# EAGLE board Arduino Uno (EAGLE 7.6.0)

Size 68.58 x 63.5 mm. Coordinates in mm from the lower left corner, seen from the top.
Copper layers (1*16): Top 0.035mm / dielectric 1.5mm / Bottom 0.035mm
Design rules "default": minimum track width 10mil, minimum drill 24mil, track to track 8mil, track to pad 8mil, pad to pad 8mil, via to via 8mil, smd to smd 8mil, copper to edge 40mil, drill to drill 8mil, minimum pad ring 10mil, minimum via ring 8mil, stop-mask expansion 4mil, vias tented up to drill 0mil, thermal gap 10mil

## Footprints (pad centres in the part's own frame; a part is rotated, then mirrored left to right if it is on the bottom)
ARDUINO_UNO = smd 0.711 x 1.422 bottom: 0@1 30.48,23.114; 1@1 27.94,23.114; 2@1 25.4,23.114; 3.3V@1 2.54,-20.574; 3@1 22.86,23.114; 4@1 20.32,23.114; 5@1 17.78,23.114; 5V@1 5.08,-20.574; 6@1 15.24,23.114; 7@1 12.7,23.114; 8@1 8.636,23.114; 9@1 6.096,23.114; 10@1 3.556,23.114; 11@1 1.016,23.114; 12@1 -1.524,23.114; 13@1 -4.064,23.114; A0@1 17.78,-20.574; A1@1 20.32,-20.574; A2@1 22.86,-20.574; A3@1 25.4,-20.574; A4@1 27.94,-20.574; A5@1 30.48,-20.574; AREF@1 -9.144,23.114; GND..@1 7.62,-20.574; GND.@1 10.16,-20.574; GND@1 -6.604,23.114; I/OREF@1 -2.54,-20.574; N/C@1 -5.08,-20.574; RESET@1 0,-20.574; SCL@1 -14.224,23.114; SDA@1 -11.684,23.114; VIN@1 12.7,-20.574 | smd 0.711 x 1.422: 0@2 30.48,23.114; 1@2 27.94,23.114; 2@2 25.4,23.114; 3.3V@2 2.54,-20.574; 3@2 22.86,23.114; 4@2 20.32,23.114; 5@2 17.78,23.114; 5V@2 5.08,-20.574; 6@2 15.24,23.114; 7@2 12.7,23.114; 8@2 8.636,23.114; 9@2 6.096,23.114; 10@2 3.556,23.114; 11@2 1.016,23.114; 12@2 -1.524,23.114; 13@2 -4.064,23.114; A0@2 17.78,-20.574; A1@2 20.32,-20.574; A2@2 22.86,-20.574; A3@2 25.4,-20.574; A4@2 27.94,-20.574; A5@2 30.48,-20.574; AREF@2 -9.144,23.114; GND..@2 7.62,-20.574; GND.@2 10.16,-20.574; GND@2 -6.604,23.114; I/OREF@2 -2.54,-20.574; N/C@2 -5.08,-20.574; RESET@2 0,-20.574; SCL@2 -14.224,23.114; SDA@2 -11.684,23.114; VIN@2 12.7,-20.574 | hole 3.2: 33.02,-17.78; 33.02,10.16; -17.78,25.4; -19.05,-22.86

## Placement (x,y rotation side)
E$1  [ARDUINO_UNO]  33.02,30.48 0 top

## Library data of the parts
E$1 = voltera_community_lib